# EAGLE board RFID-reader-schematic (EAGLE 8.7.0)
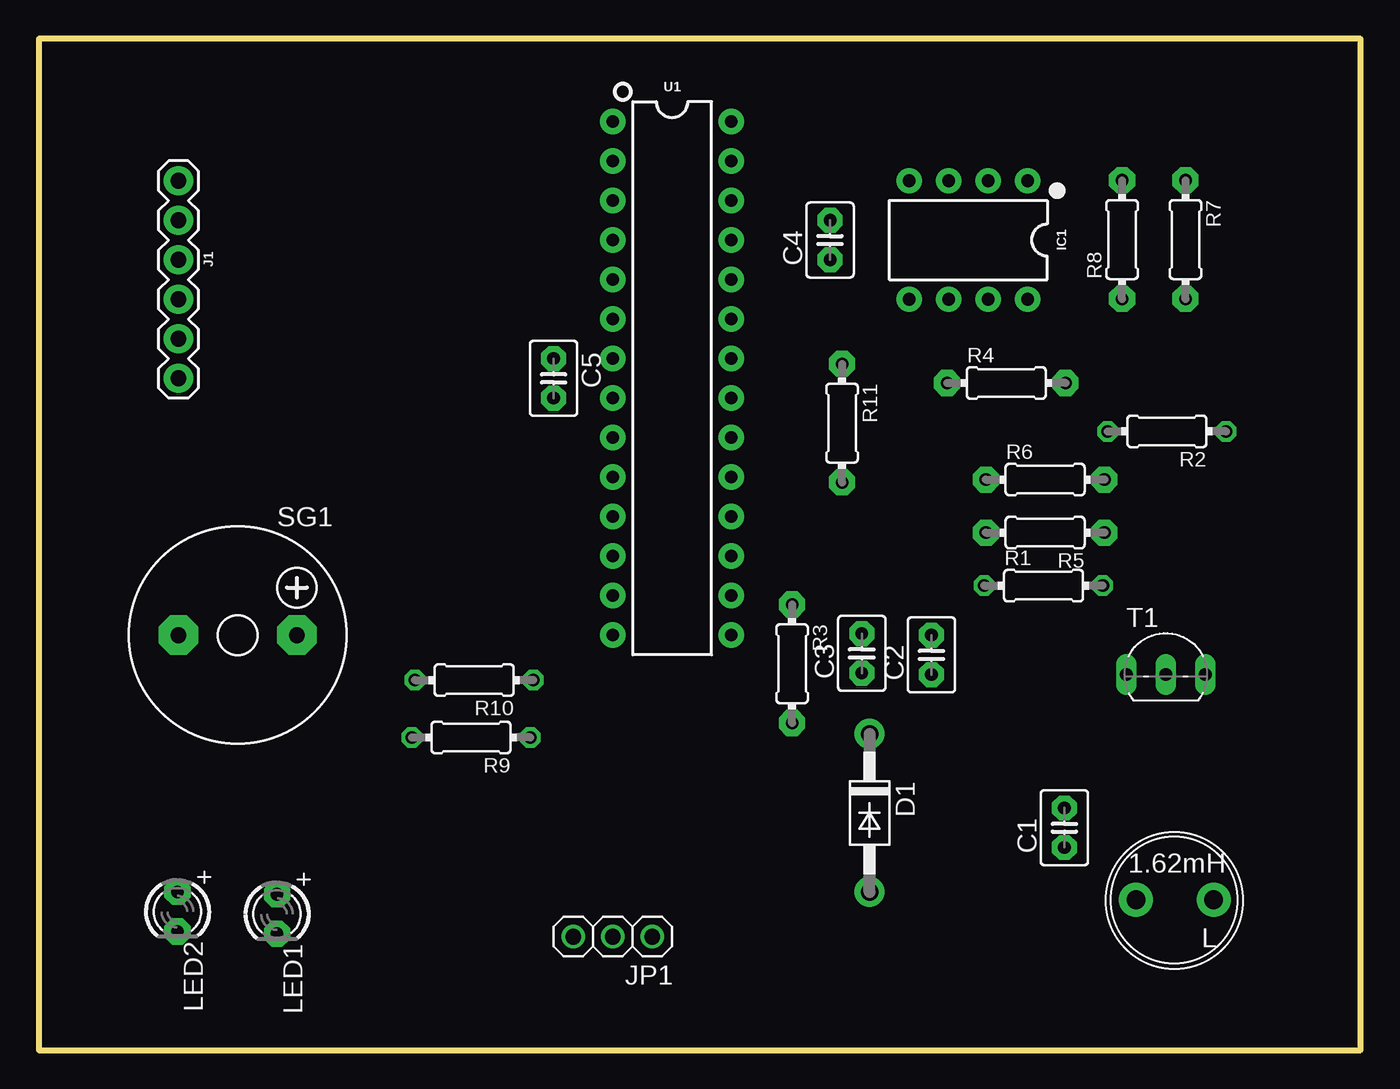
[diagram p0: board, top side]
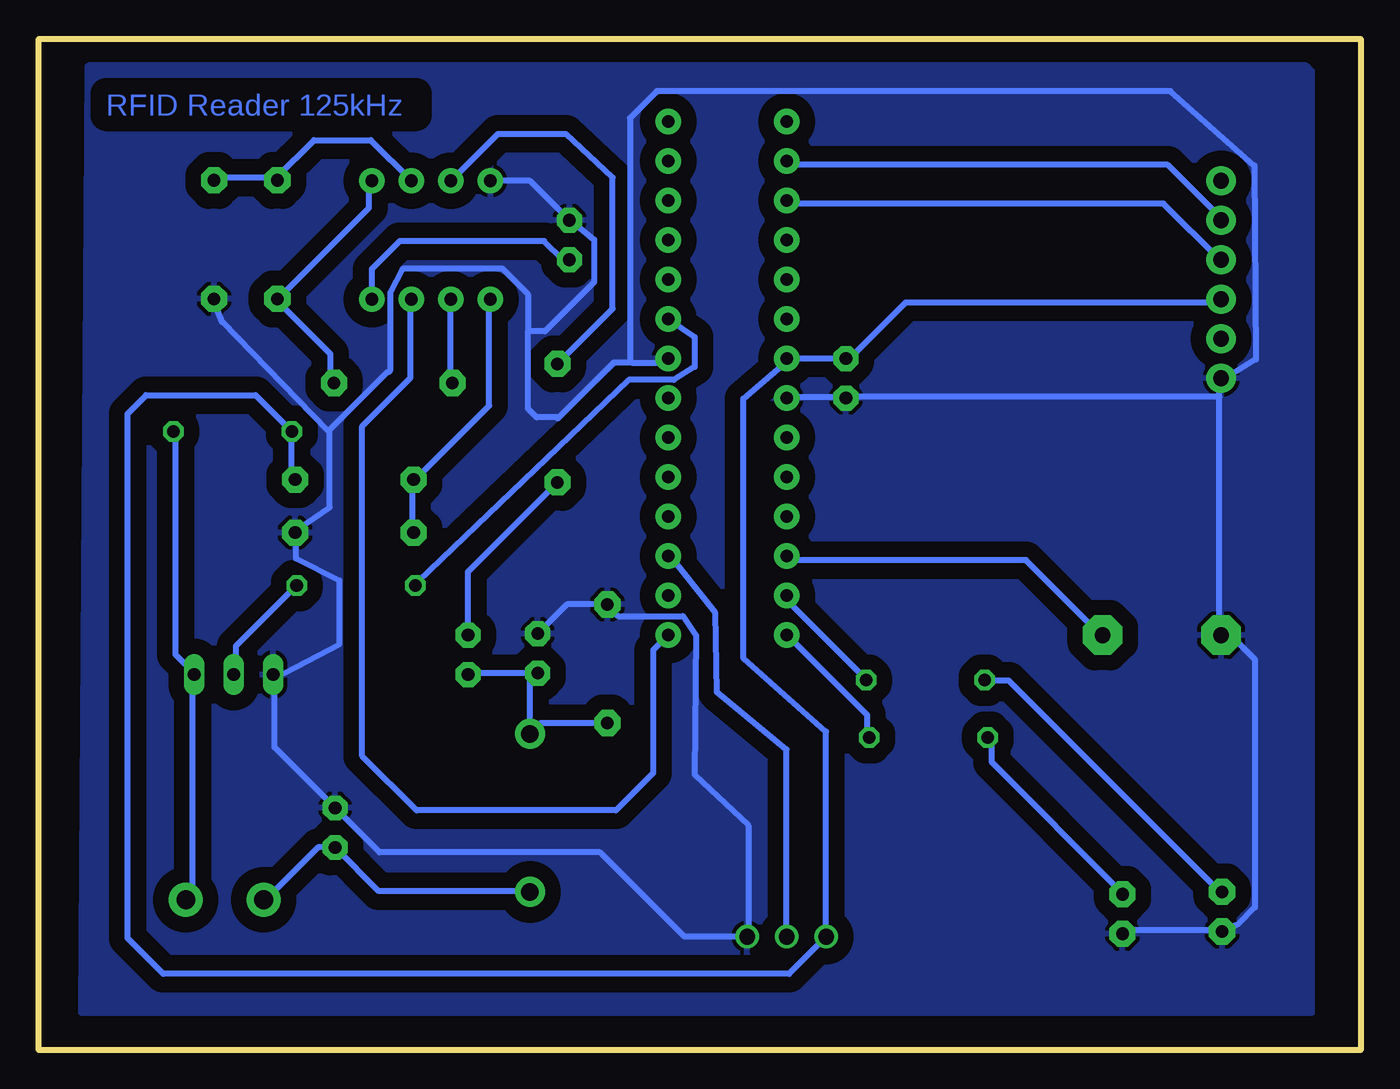
[diagram p1: board, bottom side, seen from below]

Size 85 x 65 mm. Coordinates in mm from the lower left corner, seen from the top.
Outline: 0,65 0,0 85,0 85,65 0,65
Copper layers (1*16): Top 0.035mm / dielectric 1.5mm / Bottom 0.035mm
Design rules "default *": minimum track width 0.4mm, minimum drill 0.4mm, track to track 6mil, track to pad 6mil, pad to pad 6mil, via to via 6mil, smd to smd 6mil, copper to edge 0.4mm, drill to drill 0.4mm, minimum pad ring 10mil, minimum via ring 8mil, stop-mask expansion 4mil, vias tented up to drill 0mil, thermal gap 10mil

## Footprints (pad centres in the part's own frame; a part is rotated, then mirrored left to right if it is on the bottom)
C2.5-3 = drill 0.813 pad 1.6 octagon: 1 -1.27,0; 2 1.27,0
DO41-10 = drill 1.118 pad 1.93: A 5.08,0; C -5.08,0
DIP08 = drill 0.813 pad 1.626: 1 -3.81,-3.81; 2 -1.27,-3.81; 3 1.27,-3.81; 4 3.81,-3.81; 5 3.81,3.81; 6 1.27,3.81; 7 -1.27,3.81; 8 -3.81,3.81
FTDI_BASIC = drill 1.016 pad 1.88: CTS 10.16,0; DTR 0,0; GND 12.7,0; RXI 2.54,0; TXO 5.08,0; VCC 7.62,0
1X03 = drill 1.016: 1 -2.54,0; 2 0,0; 3 2.54,0
6000 = drill 1.2 pad 2.184: 1 -2.5,0; 2 2.5,0
LED3MM = drill 0.813 pad 1.676 octagon: A -1.27,0; K 1.27,0
0204/7 = drill 0.813 octagon: 1 -3.81,0; 2 3.81,0
0204/7' = drill 0.813 pad 1.676 octagon: 1 -3.81,0; 2 3.81,0
F/CM12P = drill 1.016 pad 2.54 octagon: + 3.81,0; - -3.81,0
TO92-EBC-OVAL = drill 0.813 long: B 0,-1.27; C 2.54,-1.27; E -2.54,-1.27
DIP28 = drill 0.813 pad 1.626: 1 -16.51,-3.81; 2 -13.97,-3.81; 3 -11.43,-3.81; 4 -8.89,-3.81; 5 -6.35,-3.81; 6 -3.81,-3.81; 7 -1.27,-3.81; 8 1.27,-3.81; 9 3.81,-3.81; 10 6.35,-3.81; 11 8.89,-3.81; 12 11.43,-3.81; 13 13.97,-3.81; 14 16.51,-3.81; 15 16.51,3.81; 16 13.97,3.81; 17 11.43,3.81; 18 8.89,3.81; 19 6.35,3.81; 20 3.81,3.81; 21 1.27,3.81; 22 -1.27,3.81; 23 -3.81,3.81; 24 -6.35,3.81; 25 -8.89,3.81; 26 -11.43,3.81; 27 -13.97,3.81; 28 -16.51,3.81

## Placement (x,y rotation side)
C1  1nF  [C2.5-3]  65.95,14.29 90 top
C2  0.1uF  [C2.5-3]  57.4,25.4 90 top
C3  4n7  [C2.5-3]  52.92,25.5 90 top
C4  0.1uF  [C2.5-3]  50.88,52.07 90 top
C5  0.1uF  [C2.5-3]  33.1,43.18 270 top
D1  1N4004  [DO41-10]  53.42,15.24 270 top
IC1  OP-AMP  [DIP08]  59.77,52.07 180 top
J1  6_PIN_SERIAL_CABLEPTH  [FTDI_BASIC]  8.97,55.88 270 top
JP1  [1X03]  36.91,7.29 180 top
L  1.62mH  [6000]  73.05,9.66 180 top
LED1  [LED3MM]  15.31,8.74 270 top
LED2  [LED3MM]  8.91,8.89 270 top
R1  38K  [0204/7]  64.61,29.85 0 top
R2  1K  [0204/7]  72.54,39.77 180 top
R3  33K  [0204/7']  48.44,24.83 270 top
R4  [0204/7']  62.21,42.88 0 top
R5  10K  [0204/7']  64.71,33.26 180 top
R6  1K2  [0204/7']  64.71,36.67 0 top
R7  1K  [0204/7']  73.74,52.1 270 top
R8  100k  [0204/7']  69.66,52.1 90 top
R9  330  [0204/7]  27.79,20.09 180 top
R10  330  [0204/7]  27.99,23.78 180 top
R11  1k  [0204/7']  51.65,40.3 270 top
SG1  F/CM12P  [F/CM12P]  12.78,26.67 0 top
T1  2N2222  [TO92-EBC-OVAL]  72.47,25.4 0 top
U1  328P  [DIP28]  40.72,43.18 270 top

## Library data of the parts
C1-C5 = capacitor-wima
D1 JP1 L LED1 LED2 R3-R8 R11 T1 = adafruit
IC1 = SparkFun-IC-Amplifiers; PROD_ID: NA-XXXXX
J1 = SparkFun-Connectors
R1 R2 R9 R10 = resistor
SG1 = buzzer; OC_FARNELL: unknown; OC_NEWARK: unknown
U1 = SparkFun-IC-Microcontroller; PROD_ID: IC-09136

## Nets
GND: C1.2 C3.2 C4.2 C5.2 IC1.4 J1.GND JP1.1 LED1.K LED2.K R3.1 R5.1 R7.2 SG1.- T1.E U1.8 U1.22
N$1: R10.1 U1.13
N$2: L.1 R2.1 T1.C
N$3: R1.2 T1.B
N$4: R1.1 U1.23
N$5: C1.1 D1.A L.2
N$6: IC1.6 R4.1
N$7: R9.1 U1.14
N$8: C2.1 C3.1 D1.C R3.2
N$11: IC1.7 U1.15
N$13: IC1.5 R5.2 R6.1
N$14: C4.1 IC1.8
N$16: C2.2 R11.2
N$17: IC1.1 R4.2 R8.1
N$18: IC1.2 R7.1 R8.2
N$19: SG1.+ U1.12
N$20: LED1.A R9.2
N$21: JP1.2 U1.17
N$23: J1.RXI U1.2
N$24: J1.TXO U1.3
N$26: LED2.A R10.2
N$27: IC1.3 R11.1
VCC: C5.1 J1.VCC JP1.3 R2.2 R6.2 U1.7

## Tracks (layer width: path | path; a pad name or v marks a point on that pad's centre or on a via)
GND
  Bottom 0.4: LED1.K 15.16,7.73 9.09,7.73 LED2.K 8.81,7.73 7.91,8.06 6.8,9.17 6.8,25.11 7.91,26.21 SG1.- 9.09,26.79 9.09,41.98 | U1.8 36.71,41.98 33.12,41.98 C5.2 32.84,41.98 9.09,41.98 | 9.09,41.98 9.09,43.09 J1.GND 8.81,43.36 8.81,43.12 6.73,44.4 6.83,56.84 12.22,61.64 45.26,61.64 47,59.9 47,44.29 46.9,44.19 | 66.29,39.87 66.43,39.81 73.22,46.8 73.72,48.06 R7.2 | 66.29,39.87 66.29,34.9 68.47,33.42 R5.1 68.47,33.14 68.47,31.59 65.66,30.18 65.66,26.09 69.85,23.91 T1.E 69.85,24.03 69.85,19.46 C1.2 63.09,12.7 48.9,12.7 43.49,7.29 JP1.1 39.37,7.36 39.37,14.44 42.84,17.7 42.73,26.64 43.59,27.9 47.75,27.9 48.31,28.45 R3.1 51.05,28.64 C3.2 | 51.07,53.58 C4.2 | 55.76,55.79 IC1.4 53.42,55.88 C4.2 | 46.9,44.19 48.03,44.19 51.56,40.66 | 46.9,44.19 44.72,44.19 U1.22 | 51.62,40.6 51.56,40.66 | 53.55,46.2 53.55,41.23 52.99,40.66 51.56,40.66 | C4.2 50.79,53.31 49.29,52.1 49.29,49.37 52.45,46.2 53.55,46.2 | 53.55,46.2 53.55,48.58 55.21,50.24 61.56,50.24 62.39,48.71 62.39,43.71 62.5,43.6 62.56,43.6 66.29,39.87
  pour Bottom (isolate 1): 3.1,2.4 3.1,62.9 3.5,63.3 81.8,63.3 81.9,63.2 82.3,2.4 3.7,2.4
N$1
  Bottom 0.4: R10.1 32.01,24.03 36.98,29 U1.13
N$2
  Bottom 0.4: L.1 75.37,9.67 75.1,9.94 75.1,24.03 T1.C 75.1,24.31 76.2,25.41 76.2,39.5 R2.1
N$3
  Bottom 0.4: T1.B 72.34,24.31 72.34,25.96 68.47,29.83 R1.2
N$4
  Bottom 0.4: R1.1 60.84,29.81 60.65,30.11 47.07,43.09 44.16,43.09 42.84,43.92 42.84,45.85 44.44,46.95 U1.23
N$5
  Bottom 0.4: L.2 70.4,9.67 67.05,13.02 C1.1 63.15,10.22 53.55,10.22 D1.A
N$6
  Bottom 0.4: IC1.6 58.53,48.06 58.53,43.09 R4.1
N$7
  Bottom 0.4: R9.1 31.73,20.16 31.73,21.54 36.71,26.52 U1.14
N$8
  Bottom 0.4: R3.2 52.72,21.02 D1.C 53.42,23.73 C3.1 57.3,24.23 C2.1
N$11
  Bottom 0.4: U1.15 45.5,25.7 45.5,17.8 47.9,15.4 60.7,15.4 64.2,18.9 64.2,40.1 61.1,43.2 61.1,48.2 IC1.7
N$13
  Bottom 0.4: IC1.5 56.04,48.06 56.04,41.43 60.74,36.73 R6.1 61.01,36.46 61.01,33.42 R5.2
N$14
  Bottom 0.4: 63.6,48.34 IC1.8 63.6,48.28 63.6,50.2 61.8,52 52.5,52 51.3,50.8 C4.1
N$16
  Bottom 0.4: C2.2 57.4,30.74 R11.2
N$17
  Bottom 0.4: IC1.1 63.77,55.79 63.77,54.13 69.57,48.34 R8.1 69.57,48.06 66.26,44.74 66.26,43.09 R4.2
N$18
  Bottom 0.4: 69.77,56.07 R8.2 69.85,56.07 | 69.85,56.07 73.72,56.07 R7.1 | 69.85,56.07 69.73,56.07 67.3,58.5 63.66,58.5 IC1.2
N$19
  Bottom 0.4: U1.12 36.71,31.49 21.52,31.49 16.82,26.79 SG1.+
N$20
  Bottom 0.4: R9.2 23.73,19.89 23.73,18.5 15.44,10.22 LED1.A
N$21
  Bottom 0.4: 36.98,7.46 JP1.2 36.91,19.31 41.4,23 41.5,28.1 44.62,32.02 | 44.62,32.02 44.44,31.49 | 44.62,32.02 U1.17
N$23
  Bottom 0.4: U1.2 36.71,56.9 12.4,56.9 9.09,53.58 J1.RXI
N$24
  Bottom 0.4: U1.3 36.71,54.41 12.68,54.41 9.09,50.82 J1.TXO
N$26
  Bottom 0.4: R10.2 24,23.75 22.62,23.75 9.09,10.22 LED2.A
N$27
  Bottom 0.4: IC1.3 55.48,58.9 51.1,58.9 48.1,56.1 48.1,47.66 R11.1
VCC
  Bottom 0.4: R6.2 68.75,36.73 68.75,39.5 R2.2 71.06,42.1 78.1,42.1 79.3,40.9 79.3,7.2 77,4.9 36.76,4.9 JP1.3 | 34.5,7.46 JP1.3 | J1.VCC 9.09,48.06 29.25,48.06 32.84,44.47 C5.1 33.12,44.47 36.71,44.47 U1.7 36.98,44.19 39.7,41.87 39.7,25.2 34.37,20.47 JP1.3

## Text on the board
Bottom: RFID Reader 125kHz